# EAGLE board centre Contact (EAGLE 9.6.2)
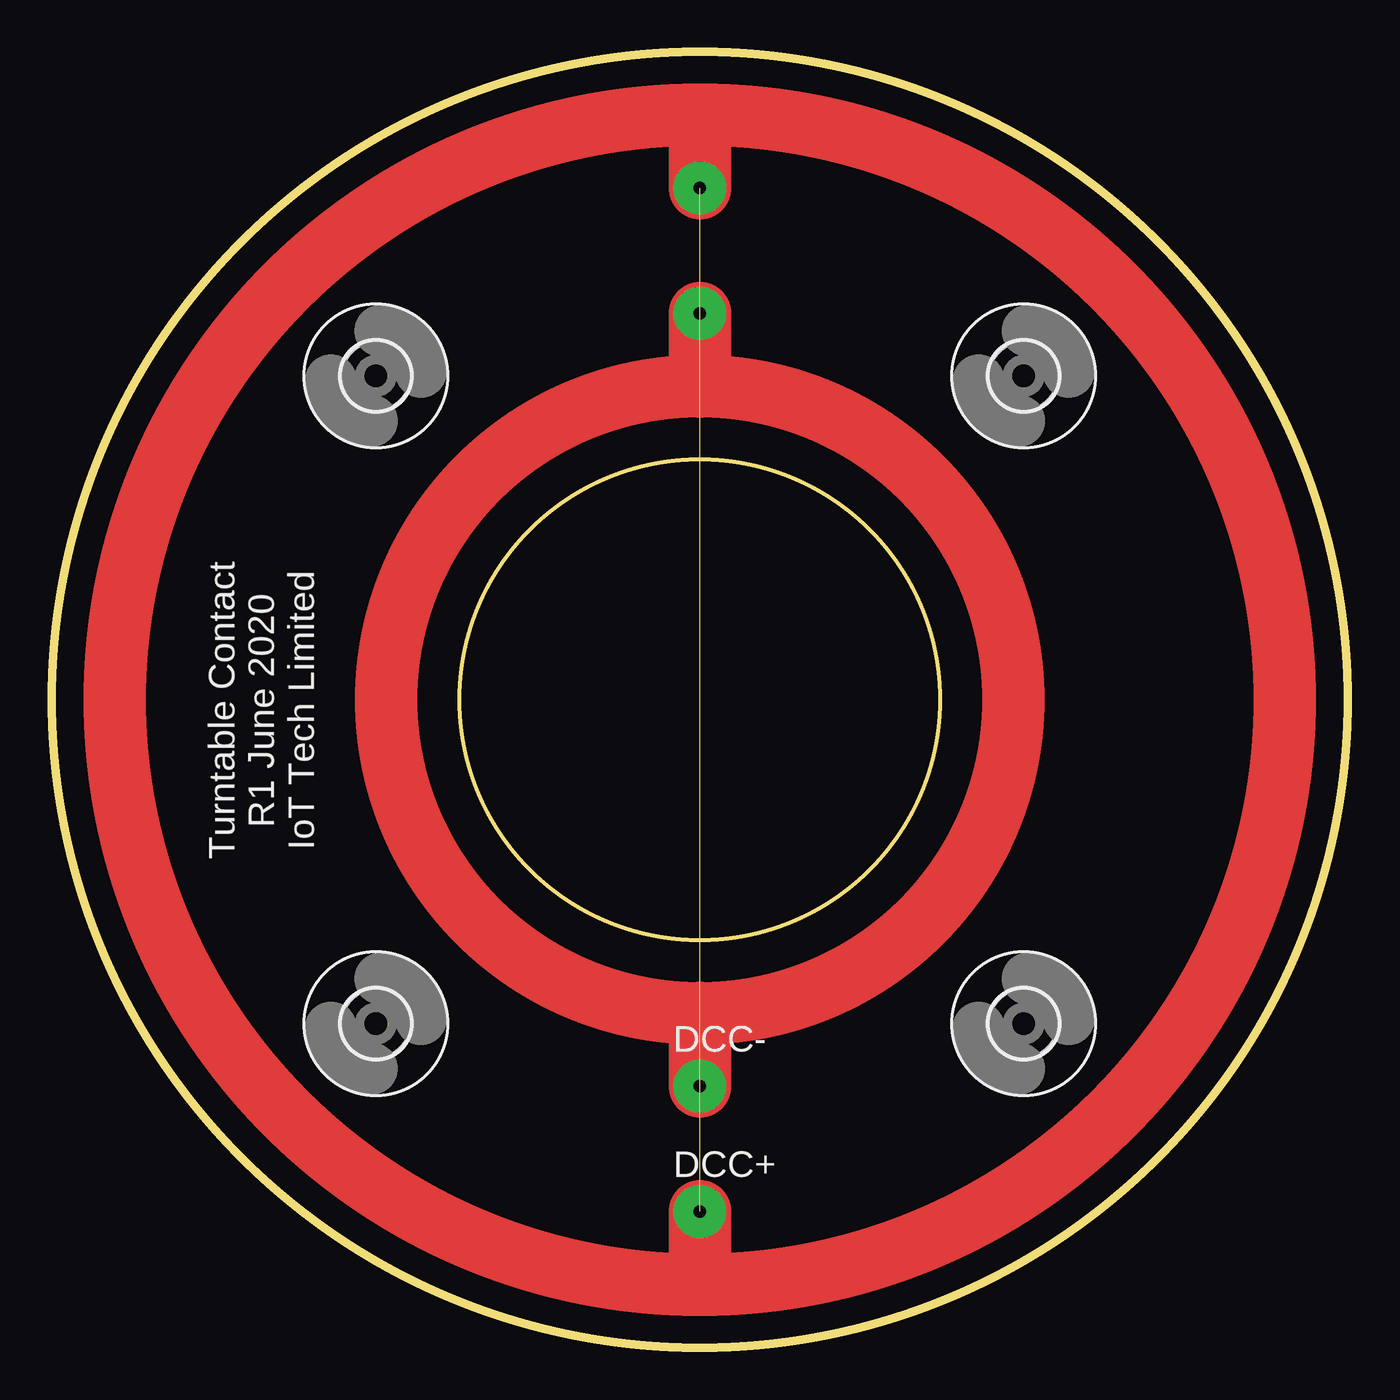
[diagram p0: board, top side]
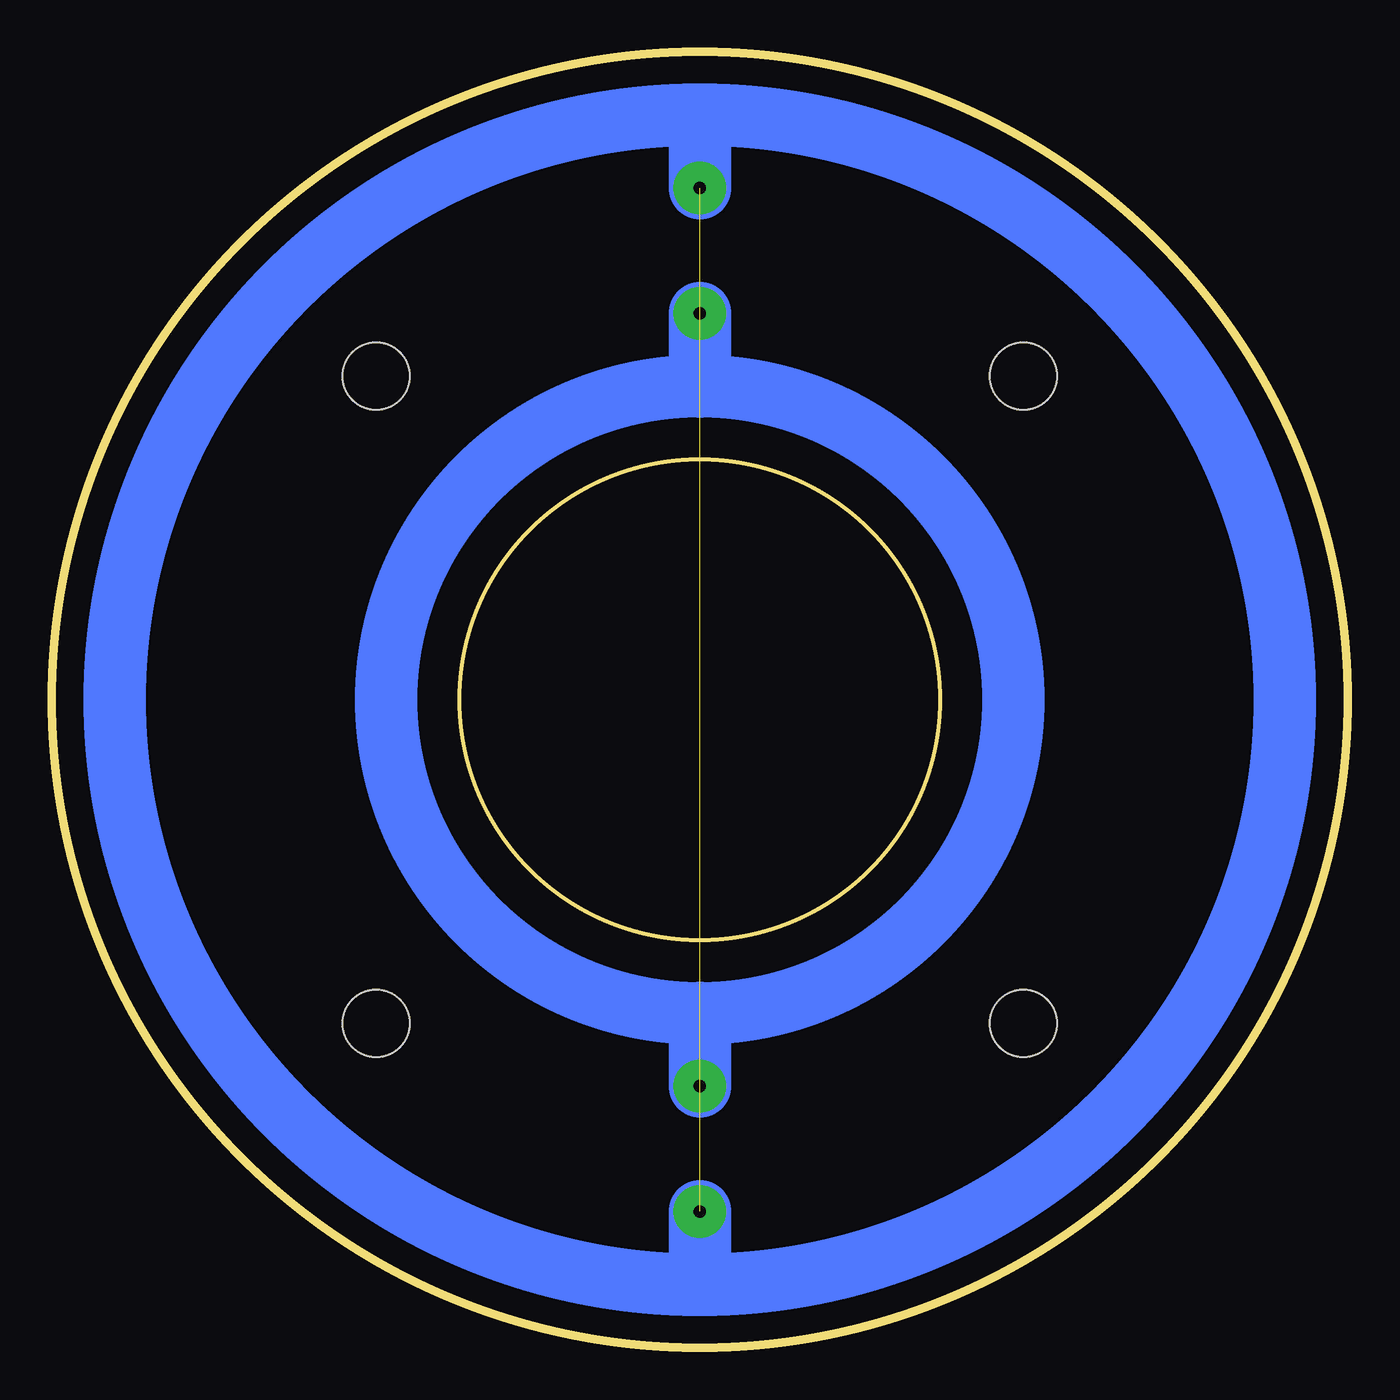
[diagram p1: board, bottom side, seen from below]

Size 62 x 62 mm. Coordinates in mm from the lower left corner, seen from the top.
Outline: circle at 31,31 radius 31
Copper layers (1*16): Top 0.035mm / dielectric 1.5mm / Bottom 0.035mm
Design rules "default": minimum track width 6mil, minimum drill 0.35mm, track to track 6mil, track to pad 6mil, pad to pad 6mil, via to via 6mil, smd to smd 6mil, copper to edge 25mil, drill to drill 6mil, minimum pad ring 10mil, minimum via ring 8mil, stop-mask expansion 4mil, vias tented up to drill 0mil, thermal gap 10mil
Milling: area 19.5,19.5 to 42.5,42.5

## Footprints (pad centres in the part's own frame; a part is rotated, then mirrored left to right if it is on the bottom)
B2,54 = smd 2.54 x 2.54: TP 0,0
3,2 = hole 3.2: 0,0

## Placement (x,y rotation side)
DCC+  TPB2,54  [B2,54]  31,6.5 0 top
DCC-  TPB2,54  [B2,54]  31,12.5 0 top
H1  MOUNT-HOLE3.2  [3,2]  15.5,15.5 0 top
H2  MOUNT-HOLE3.2  [3,2]  15.5,46.5 0 top
H3  MOUNT-HOLE3.2  [3,2]  46.5,46.5 0 top
H4  MOUNT-HOLE3.2  [3,2]  46.5,15.5 0 top

## Library data of the parts
DCC+ DCC- = testpad
H1-H4 = holes

## Nets
DCC+: DCC+.TP
DCC-: DCC-.TP

## Tracks (layer width: path | path; a pad name or v marks a point on that pad's centre or on a via)
DCC+  (via drill 0.6 pad 2.5)  (1 unrouted)
  Top 3: DCC+.TP 31,3.5 | v31,55.5 31,58.5
  Bottom 3: v31,55.5 31,58.5 | DCC+.TP 31,3.5 31,3
  other vias: 31,6.5
DCC-  (via drill 0.6 pad 2.5)  (1 unrouted)
  Top 3: DCC-.TP 31,16 | v31,49.5 31,46
  Bottom 3: v31,49.5 31,46 | DCC-.TP 31,16
  other vias: 31,12.5
(copper drawn outside any net)
  shapes: Bottom circle x2, Top circle x2

## Text on the board
tPlace: Turntable Contact / R1 June 2020 / IoT Tech Limited